# Altium PCB WaterAlarm_V1.1.PcbDoc
Units mm, origin at the board's own origin, x right, y up, seen from the top; angles counter-clockwise.
Board outline 85.11 x 72.79 mm, 2 copper layers (Top Layer, Bottom Layer), stack 1.581 mm thick; 31 components, 24 nets, 100 pads, 68 vias.
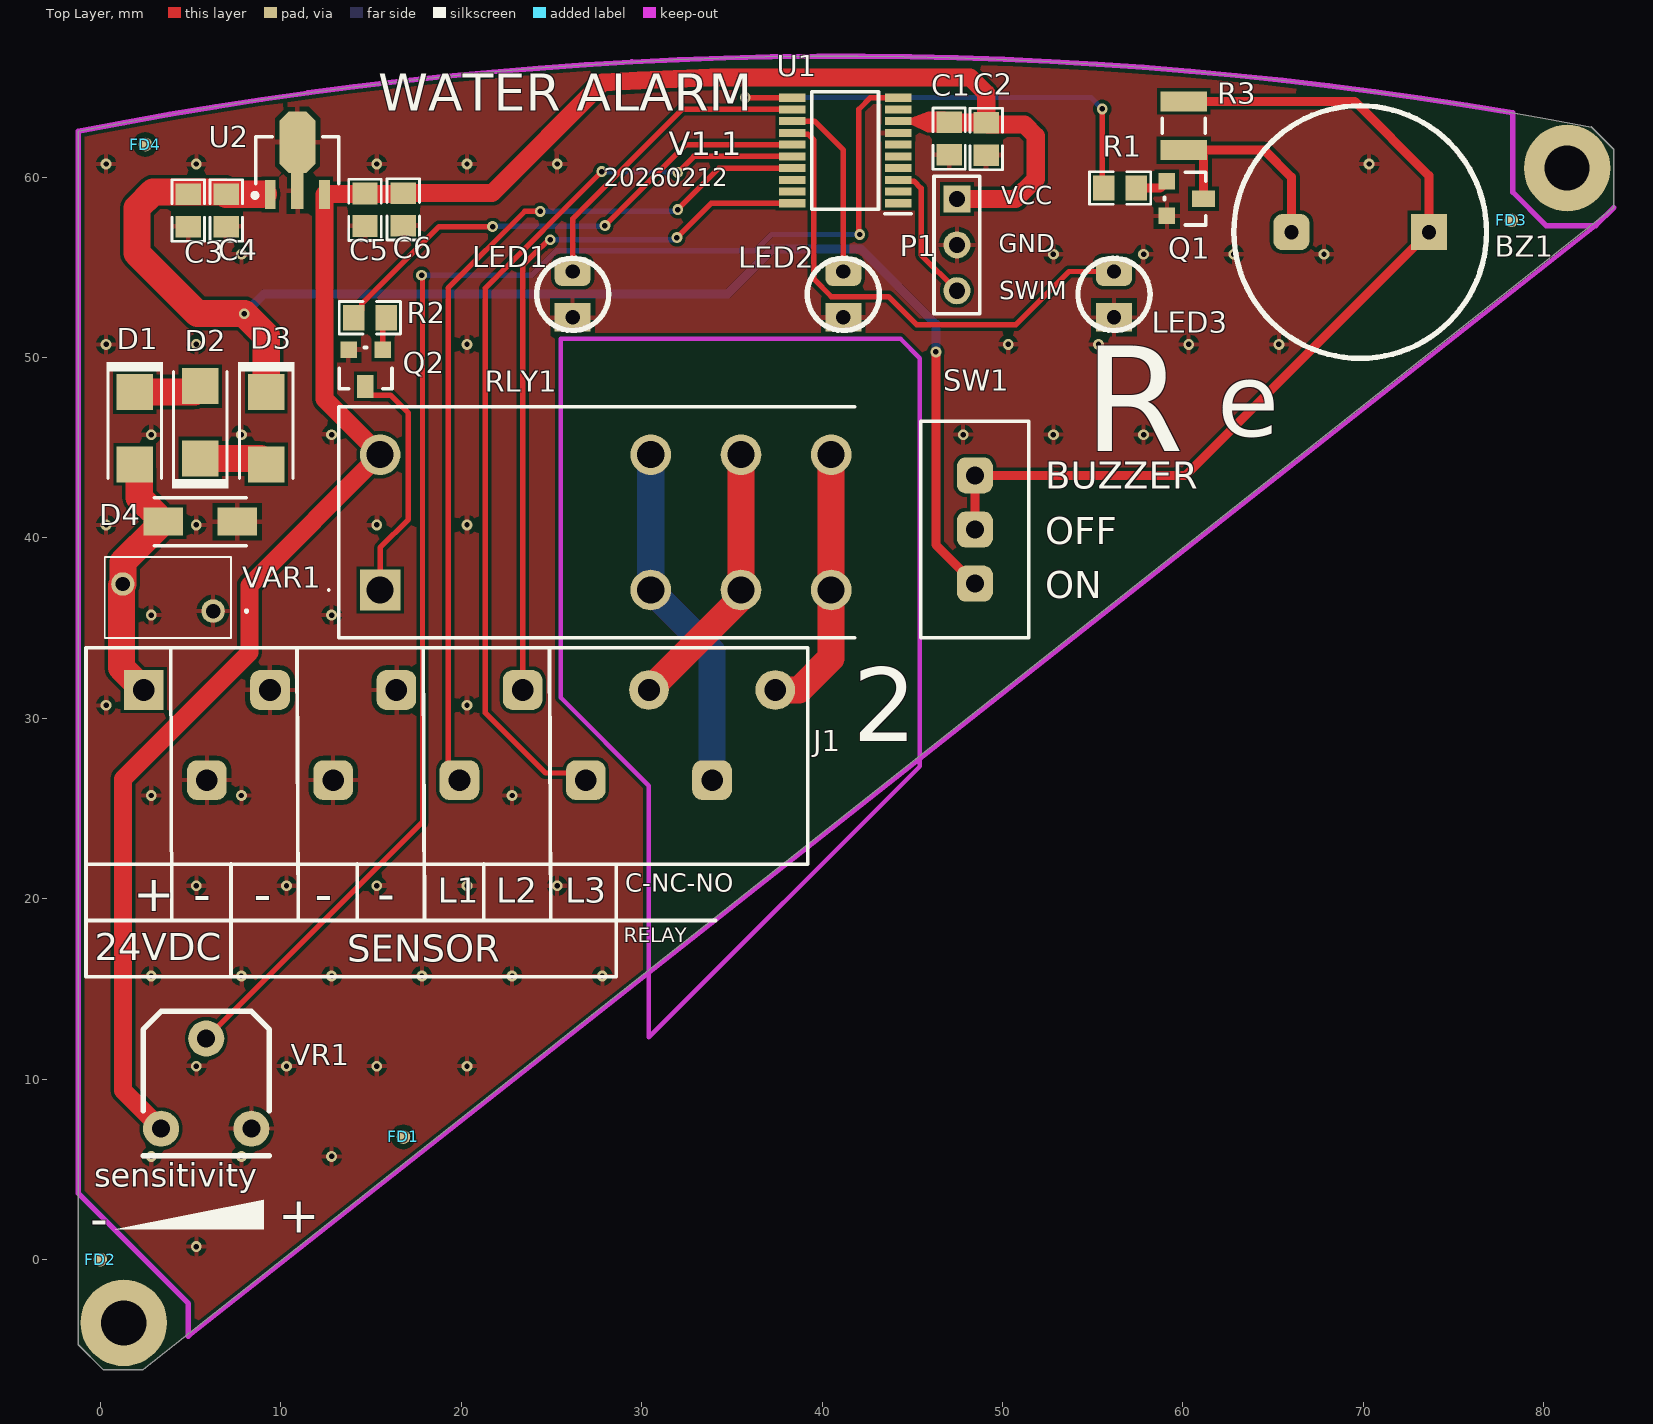
[diagram p0: Top Layer view]
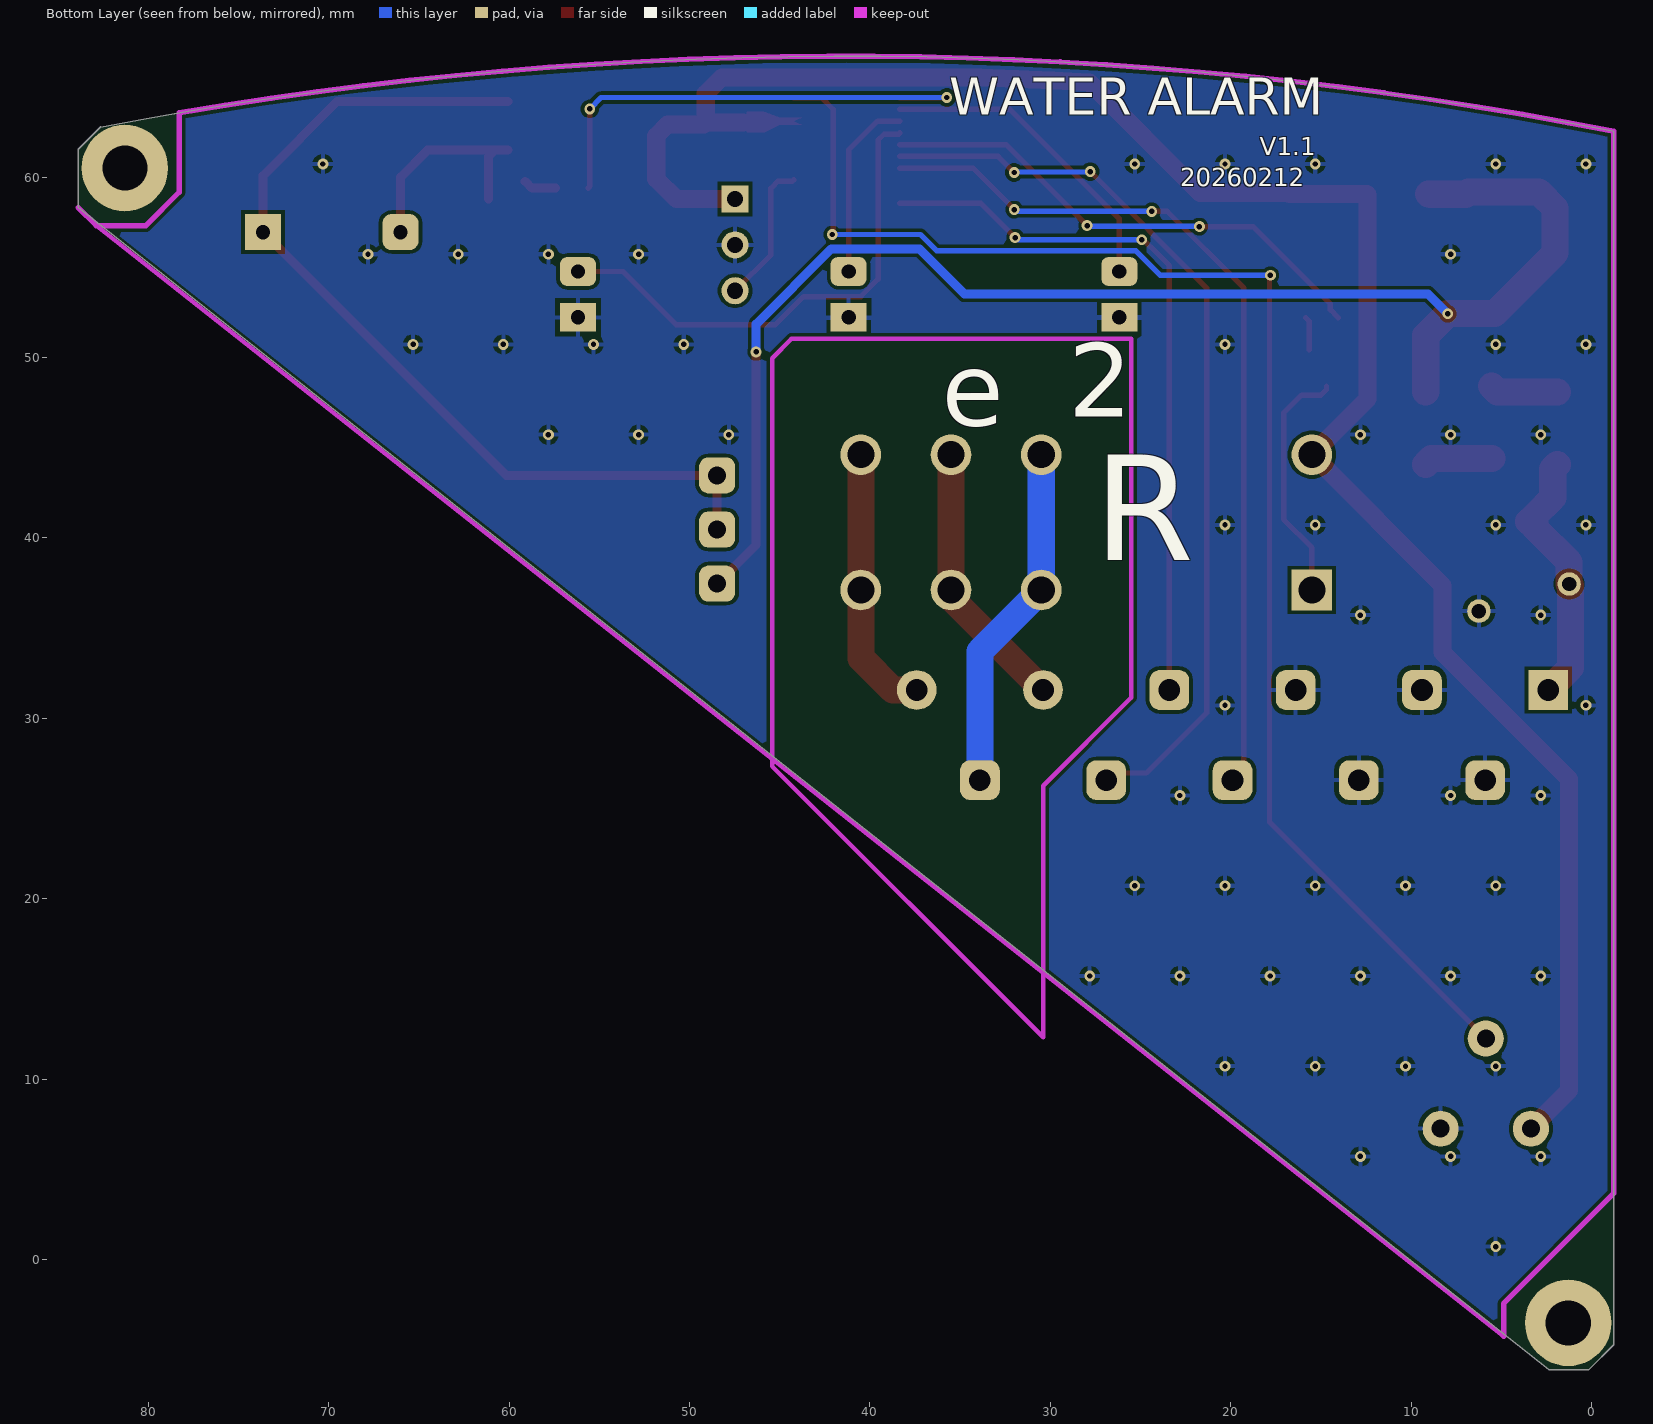
[diagram p1: Bottom Layer view, seen from below]

## Layer stack, top to bottom
Top Solder: solder mask 0.0254, SM-001, Dk 4
Top Layer: signal copper 0.0356
Dielectric 1: dielectric 1.51, FR-4, Dk 4.8
Bottom Layer: signal copper 0.0356
Bottom Solder: solder mask 0.0254, SM-001, Dk 4

## Board outline
-1.217,-4.717 0.157,-6.091 2.382,-6.091 83.883,58.313 83.883,61.541 82.636,62.788 82.632,62.766 ccw(c41.3,-152.4) -1.223,62.534 -1.217,62.534

## Design rules (kind name [scope] priority, off if disabled: settings)
Clearance [All] p1: gap=0.2 ignorepadtopadclearanceinfootprint=TRUE
PolygonConnect [All] p1: connectstyle=Relief reliefconductorwidth=0.254 reliefentries=4 polygonreliefangle="90 Angle" airgapwidth=0.254
RoutingVias [All] p1: holewidth=0.711 width=1.27 viastyle="Through Hole" minholewidth=0.3 minwidth=0.5 maxholewidth=0.711 maxwidth=1.27
SilkToSilkClearance [All] p1: silktosilkclearance=0.01
SilkToSolderMaskClearance [IsPad] p1: minsilkscreentomaskgap=0.01 clearancetoexposedcopper=TRUE
SolderMaskExpansion [All] p1: expansion=0.102 istentingtop=FALSE
SupplyNets "Schematic Supply Nets_3" [InNet('24V_IN')] p1: voltage=0.000
SupplyNets "Schematic Supply Nets_2" [InNet('VCC')] p2: voltage=0.000
SupplyNets "Schematic Supply Nets_1" [InNet('24V')] p3: voltage=0.000
SupplyNets "Schematic Supply Nets" [InNet('GND')] p4: voltage=0.000
Width [All] p1: maxlimit=3 minlimit=0.254 preferedwidth=0.254 minimp=50.000000 maximp=50.000000 favimp=50.000000
28 further rules are at their usual default settings.

## Classes and differential pairs
component class Sheet1_WATERALARM: BZ1 C1 C2 C3 C4 C5 C6 D1 D2 D3 D4 D? J1 LED1 LED2 LED3 P1 Q1 Q2 R1 R2 R3 RLY1 SW1 U1 U2 VAR1 VR1

## Components (designator, comment, footprint, x,y, rotation, side; value= is the part's Value field where it differs from the comment)
BZ1 "EPT-14A4009P050D" "piezo buzzer" 69.829,56.952 r90 top
C1 "CL21B104KBCNNNL" C0805-N 47.045,62.134 r90 top value=100nF
C2 "CL21A475KBQNNNE" C0805-N 49.103,62.108 r90 top value=4.7uF
C3 "CL21B104KBCNNNL" C0805-N 4.873,58.149 r90 top value=100nF
C4 "CL21A475KBQNNNE" C0805-N 6.982,58.149 r90 top value=4.7uF
C5 "CL21B104KBCNNNL" C0805-N 14.678,58.186 r90 top value=100nF
C6 "CL21A475KBQNNNE" C0805-N 16.786,58.211 r90 top value=4.7uF
D1 "US1D_R1_00001" SMA 1.91,46.081 r270 top value="200V 1A"
D2 "US1D_R1_00001" SMA 5.542,46.411 r90 top value="200V 1A"
D3 "US1D_R1_00001" SMA 9.199,46.081 r270 top value="200V 1A"
D4 "SMAJ36CA/TR7" DIONM5127X250N 5.542,40.899 r180 top value=58.1V
FD1 "FIDUCIAL_30MIL" FIDUCIAL_30MIL 16.8,6.8 r90 top
FD2 "FIDUCIAL_30MIL" FIDUCIAL_30MIL 0,0 r90 top (schematic designator FD1)
FD3 "FIDUCIAL_30MIL" FIDUCIAL_30MIL 78.2,57.6 r90 top (schematic designator FD1)
FD4 "FIDUCIAL_30MIL" FIDUCIAL_30MIL 2.5,61.8 r90 top (schematic designator FD1)
J1 "DG250-3.5-11P" "11 pin Terminal sping loaded" 2.408,31.573 r0 top
LED1 "3R4HD-7-TB" "led 3mm" 26.183,53.498 r270 top
LED2 "3R4HD-7-TB" "led 3mm" 41.183,53.498 r270 top
LED3 "3R4HD-7-TB" "led 3mm" 56.183,53.498 r270 top
P1 "PROGRAMMING" HDR1X3 47.477,58.781 r270 top
Q1 "BC817-40,215" SOT-23 60.126,58.806 r270 top
Q2 "BC817-40,215" SOT-23 14.71,49.414 r180 top
R1 "0805S8J0103T5E" C0805-N 56.52,59.39 r180 top value=10K
R2 "0805S8J0103T5E" C0805-N 14.94,52.202 r180 top value=10K
R3 "RI1210L122JT" C1210 60.05,62.845 r90 top value=1.2K
RLY1 "JW2SN-DC5V" JW2SNDC5V 15.51,37.115 r0 top
SW1 "L-KLS7-SS-12F20A-G5" "Slide Switch" 48.468,40.467 r90 top
U1 "STM8L051F3P6TR" SOP65P640X120-20N 41.28,61.473 r180 top
U2 "L78L33ACUTR" SOT89M 10.925,60.935 r90 top
VAR1 "ERZ-V05D560" ERZV05D180 6.253,35.946 r180 top
VR1 "L-KLS4-WH06-2A-103" Potentiometer 5.872,9.759 r0 top value=10K

## Footprints (in the part's own frame and the unit in brackets; to place one, negate y for a bottom-side part, rotate by r counter-clockwise, add the part's x,y. Pads: shape width x height; smd on the part's side, far side on the other; paste and mask are expansions set on the pad)
"11 pin Terminal sping loaded" [mm]
  rect 2.2x2.2 hole 1.2: 1(0,0)
  rrect50% 2.2x2.2 hole 1.2: 2(3.5,-5) 3(7,0) 4(10.5,-5) 5(14,0) 6(17.5,-5) 7(21,0) 8(24.5,-5) 10(31.5,-5)
  round 2.2 hole 1.2: 9(28,0) 11(35,0)
  silkscreen extent -3.2,-9.65 36.8,2.35, body extent -3.2,-9.57 36.8,2.43, height 13.15
C0805-N [mm] "Chip Resistor, Body 2.0x1.3mm, IPC Medium Density"
  rect 1.2x1.4 smd: 1(-0.9,0) 2(0.9,0)
  silkscreen extent -1.7,-0.9 1.7,0.9, body extent -1.07,-0.7 1.07,0.7, height 1.55
C1210 [mm] "Chip Capacitor, Body 3.2x2.5mm, IPC High Density"
  rect 1.1x2.6 smd: 1(-1.35,0) 2(1.35,0)
  silkscreen extent -0.4,-1.2 0.4,1.2, body extent -1.7,-1.35 1.7,1.35, height 1.3
DIONM5127X250N [mm]
  rect 2.2x1.55 smd: 1(-2.05,0) 2(2.05,0)
  silkscreen extent -2.55,-1.33 2.55,1.33, body extent -2.55,-1.33 2.55,1.33, height 2.25
ERZV05D180 [mm]
  round 1.3 hole 0.8: 1(0,0) 2(5,-1.5)
  silkscreen extent -1.9,-3 6,1.5, body extent -1,-3 6,1.5, height 10.1
FIDUCIAL_30MIL [mil]
  round 30 smd paste-99999 mask+11: 1(0,0)
HDR1X3 [mm]
  rect 1.5x1.5 hole 0.9: 1(0,0)
  round 1.5 hole 0.9: 2(2.54,0) 3(5.08,0)
  silkscreen extent -1.27,-1.27 6.35,1.27
JW2SNDC5V [mm]
  rect 2.25x2.25 hole 1.5: 1(0,0)
  round 2.25 hole 1.5: 2(15,0) 3(20,0) 4(25,0) 5(25,7.5) 6(20,7.5) 7(15,7.5) 8(0,7.5)
  silkscreen extent -2.9,-2.65 26.3,10.15, body extent -2.26,-2.64 26.34,10.16, height 20
"led 3mm" [mm]
  rrect50% 1.6x2 hole 0.8: 1(-1.27,0)
  rect 1.6x2 hole 0.8: 2(1.27,0)
  silkscreen extent -2,-2 2,2
"piezo buzzer" [mm]
  rect 2x2 hole 0.8: 1(0,-3.81)
  rrect50% 2x2 hole 0.8: 2(0,3.81)
  silkscreen extent -7,-7 7,7
Potentiometer [mm]
  round 2 hole 1: 1(-2.5,-2.5) 2(2.5,-2.5) 3(0,2.5)
  silkscreen extent -3.5,-4 3.5,4
"Slide Switch" [mm]
  rrect50% 2x2 hole 1: 1(-3,0) 2(0,0) 3(3,0)
  silkscreen extent -6,-3 6,3
SMA [mm]
  rect 2x2 smd: 1(-2,0) 2(2,0)
  silkscreen extent -3.66,-1.57 2.79,1.57, body extent -2.6,-1.3 2.6,1.3, height 2.42
SOP65P640X120-20N [mm]
  rect 1.475x0.45 smd: 1(-2.938,2.925) 2(-2.938,2.275) 3(-2.938,1.625) 4(-2.938,0.975) 5(-2.938,0.325) 6(-2.938,-0.325) 7(-2.938,-0.975) 8(-2.938,-1.625) 9(-2.938,-2.275) 10(-2.938,-2.925) 11(2.938,-2.925) 12(2.938,-2.275) 13(2.938,-1.625) 14(2.938,-0.975) 15(2.938,-0.325) 16(2.938,0.325) 17(2.938,0.975) 18(2.938,1.625) 19(2.938,2.275) 20(2.938,2.925)
  silkscreen extent -3.67,-3.25 1.85,3.5, body extent -3.2,-3.25 3.2,3.25, height 1.2
SOT89M [mm] "SOT89, 3-Leads, Body 4.5x2.4 mm, Pitch 1.5mm, Lead Span 4.1mm, IPC Low Density"
  rect 1.6x0.6 smd: 1(-1.9,1.5) 3(-1.9,-1.5)
  rect 2x0.7 smd: 2(-1.7,0)
  oct 3.4x2 smd: 2(1,0)
  silkscreen extent -2.07,-2.3 1.3,2.47, body extent -1.3,-2.3 1.3,2.3, height 1.6
SOT-23 [mil]
  rect 36x36 smd: 1(-37.5,-40) 2(37.5,-40)
  rect 36x50 smd: 3(0.5,40)
  silkscreen extent -58,-45 58,45, body extent -60,-48 60,48, height 43

## Part data
BZ1: library part Buzzer, "BUZZER PIEZO W/O CIRCUIT 9V 4-KHZ THT", Manufacturer=SANCO, Manufacturer Part Number=EPT-14A4009P050D
C1 C3 C5: library part Cap, "MLCC (2012) 0805 100nF 50VDC ±10% X7R", Manufacturer=SAMSUNG, Manufacturer Part Number=CL21B104KBCNNNL
C2 C4 C6: library part Cap, "MLCC (2012) 0805 4.7uF 50VDC ±10% X5R", Manufacturer=SAMSUNG, Manufacturer Part Number=CL21A475KBQNNNE
D1 D2 D3: library part MURA160T3G, "DIODE U.FAST SINGLE 1A 200V DO214AC (SMA) SMT", Manufacturer="ON Semiconductor", ComponentLink1Description="Datasheet link", ComponentLink1URL=http://www.onsemi.com/pub_link/Collateral/MURA160T3-D.PDF, Manufacturer Part Number=US1D_R1_00001
D4: library part SMAJ36CA-AT_TR7, "58.1V Clamp 6.9A Ipp Tvs Diode Surface Mount DO-214AC (SMA)", Manufacturer=YAGEO, Height=2.5mm, Manufacturer Part Number=SMAJ36CA/TR7
FD1 FD2 FD3 FD4: "FD"
J1: "TERM.BLK.3.50MM 11P PCB TYPE GRAY GAOSONG", Manufacturer=DEGSON/GAOSONG, Manufacturer Part Number=DG250-3.5-11P
LED1 LED2 LED3: library part LED2, "LED 3MM RED 30mcd 35° RED/DIFFUSED", Manufacturer="STRONG BASE", Manufacturer Part Number=3R4HD-7-TB
P1: library part "Header 3", "Header, 3-Pin"
Q1 Q2: library part NPN, "TRANSISTOR DIS.500mA 45V NPN SOT23 GEN. SMT", Manufacturer=NXP, Manufacturer Part Number=BC817-40,215
R1 R2: library part Res1, "RES.(2012) 0805 10K Ohms 5% 1/8W-S 100PPM", Manufacturer=ROYALOHM, Manufacturer Part Number=0805S8J0103T5E
R3: library part Res1, "RES.(3225) 1210 1.2K Ohms 5% 1/2W 200PPM", Manufacturer=HOTTECH, Manufacturer Part Number=RI1210L122JT
RLY1: "General Purpose Relay DPDT (2 Form C) 5VDC Coil Through Hole", Manufacturer=Panasonic, Manufacturer Part Number=JW2SN-DC5V
SW1: library part SW-SPDT, "SWITCH SLIDE 1P2T 500mA 50V On-On THT V/T", Manufacturer="KLS ELECTRONIC", Manufacturer Part Number=L-KLS7-SS-12F20A-G5
U1: "Integrated Circuit", Manufacturer_Name=STMicroelectronics, Mouser Part Number=511-STM8L051F3P6TR, Arrow Part Number=STM8L051F3P6TR, Arrow Price/Stock=https://www.arrow.com/en/products/stm8l051f3p6tr/stmicroelectronics?utm_currency=USD&region=nac, Datasheet Link=https://www.st.com/resource/en/datasheet/stm8l051f3.pdf, Height=1.2mm, Manufacturer_Part_Number=STM8L051F3P6TR, Mouser Price/Stock=https://www.mouser.co.uk/ProductDetail/STMicroelectronics/STM8L051F3P6TR?qs=jgnmLK5BaiFksEdVQwFp7A%3D%3D
U2: library part "Volt Reg", "IC-78L33 VOLTAGE REGULATOR 3.3V 100mA SOT89 ST", Manufacturer=STM, Manufacturer Part Number=L78L33ACUTR
VAR1: library part ERZ-V05D180, "56 V 250 A Varistor 1 Circuit Through Hole Disc 7mm", Manufacturer=Panasonic, Varistor Voltage="56 V", Manufacturer Part Number=ERZ-V05D560
VR1: library part "Res Tap", "TRIMPOT CARBON V 6MM 10K", Manufacturer="KLS ELECTRONIC", Manufacturer Part Number=L-KLS4-WH06-2A-103

## Free pads (board coordinates)
  round 4.8 hole 2.5: 0(1.3,-3.5) 0(81.3,60.5)

## Via types
v1: diameter 0.6, hole 0.3, Top Layer to Bottom Layer, tented both sides, 68 vias

## Nets (pads, with @x,y where several pads share a name; then routed paths per layer and width w, separated by ;. In a path a pad name is that pad's centre, name@x,y a point inside that pad or via, vN(x,y) a via of type N, cw(c..) or ccw(c..) an arc to the next point about the centre after c; other vN are vias at no path point)
24V: C3.2 C4.2 D3.1 SW1.1 U2.1 | length 78.9
  Top Layer w0.5: v1@46.309,50.323 v1(46.309,50.313) 46.309,39.626 SW1.1
  Top Layer w1.5: 9.047,59.06 8.986,59.06 8.975,59.049 C4.2 6.869,59.162 2.915,59.162 2.037,58.283 2.037,55.784 5.389,52.431 7.98,52.431 9.199,51.212 D3.1
  Bottom Layer w0.5: v1@7.98,52.431 9.067,53.518 34.759,53.518 37.259,56.018 42.135,56.018 46.309,51.844 v1(46.309,50.313)
  other v1: 7.98,52.421
24V_IN: D1.2 D4.2 J1.1 VAR1.2 | length 14.7
  Top Layer w1.5: D1.2 2.16,43.831 2.16,42.231 3.142,41.249 3.142,40.924 D4.2@3.167,40.899 ; J1.1 1.173,32.808 1.173,37.366 VAR1.2 1.253,38.66 3.142,40.549 3.142,40.874 D4.2@3.167,40.899 ; D4.2 D4.2@3.167,40.899
ADJ: U1.10 VR1.3 | length 81.9
  Top Layer w0.3: VR1.3 17.858,24.245 17.858,54.507 v1(17.81,54.555) ; v1@42.092,56.825 42.042,56.876 42.042,63.759 42.681,64.398 U1.10
  Bottom Layer w0.3: v1(17.81,54.555) 23.909,54.555 25.272,55.918 36.311,55.918 37.208,56.816 v1(42.092,56.816)
BUZ: R1.2 U1.11 | length 27.1
  Top Layer w0.3: v1@35.742,64.42 35.764,64.398 U1.11 ; v1(55.529,63.775) 55.529,59.481 R1.2
  Bottom Layer w0.3: v1(35.742,64.41) 54.903,64.41 v1@55.529,63.785
COM: J1.9 RLY1.3 RLY1.6 | length 15.2
  Top Layer w1.5: J1.9 35.51,36.675 RLY1.3 RLY1.6
GND: C1.1 C2.1 C3.1 C4.1 C5.1 C6.1 D4.1 J1.2 J1.3 J1.4 J1.5 LED1.2 LED2.2 LED3.2 P1.2 Q1.2 Q2.2 U1.7 U2.2 VAR1.1 VR1.2
  other v1: 5.323,0.723 2.823,5.723 7.823,5.723 12.823,5.723 5.323,10.723 10.323,10.723 15.323,10.723 20.323,10.723 2.823,15.723 7.823,15.723 12.823,15.723 17.823,15.723 22.823,15.723 27.823,15.723 5.323,20.723 10.323,20.723 15.323,20.723 20.323,20.723 25.323,20.723 2.823,25.723 7.823,25.723 22.823,25.723 0.323,30.723 20.323,30.723 2.823,35.723 12.823,35.723 0.323,40.723 5.323,40.723 15.323,40.723 20.323,40.723 2.823,45.723 7.823,45.723 12.823,45.723 47.823,45.723 52.823,45.723 57.823,45.723 0.323,50.723 5.323,50.723 20.323,50.723 50.323,50.723 55.323,50.723 60.323,50.723 65.323,50.723 7.823,55.723 52.823,55.723 57.823,55.723 62.823,55.723 67.823,55.723 0.323,60.723 5.323,60.723 15.323,60.723 20.323,60.723 25.323,60.723 70.323,60.723
"IN L1": J1.6 U1.17 | length 49.4
  Top Layer w0.3: J1.6 19.283,27.198 19.283,53.853 23.525,58.095 v1(24.389,58.095) ; v1(32.009,58.197) 32.009,58.222 34.285,60.498 U1.17
  Bottom Layer w0.3: v1(24.389,58.095) 31.826,58.095 31.927,58.197 v1(32.009,58.197)
"IN L2": J1.7 U1.20 | length 39.9
  Top Layer w0.3: J1.7 23.408,55.095 24.466,56.153 24.478,56.153 24.856,56.53 v1(24.937,56.53) ; v1(31.958,56.647) 33.859,58.548 U1.20
  Bottom Layer w0.3: v1(24.937,56.53) 31.76,56.53 31.877,56.647 v1(31.958,56.647)
"IN L3": J1.8 U1.16 | length 50.7
  Top Layer w0.3: J1.8 26.508,26.973 24.675,26.973 21.341,30.307 21.341,53.853 v1(27.792,60.305) ; v1(32.009,60.254) 32.903,61.148 U1.16
  Bottom Layer w0.3: v1(27.792,60.305) 27.818,60.279 31.983,60.279 v1(32.009,60.254)
L1: LED1.1 U1.12 | length 17.6
  Top Layer w0.3: LED1.1 26.183,57.68 32.252,63.748 U1.12
L2: LED2.1 U1.13 | length 10.2
  Top Layer w0.3: U1.13 39.578,63.098 41.183,61.494 LED2.1
L3: LED3.1 U1.14 | length 28
  Top Layer w0.3: U1.14 38.417,62.373 39.224,62.373 39.552,62.045 39.552,54.338 40.512,53.378 43.686,53.378 45.243,51.821 50.754,51.821 53.701,54.768 LED3.1
NC: J1.10 RLY1.2 RLY1.7 | length 19.4
  Bottom Layer w1.5: RLY1.7 RLY1.2 33.908,33.717 J1.10
NetBZ1_1: BZ1.1 R3.2 SW1.2 SW1.3 | length 52.2
  Top Layer w0.5: SW1.2 SW1.3 60.155,43.467 BZ1.1 73.639,60.076 69.521,64.195 R3.2
NetBZ1_2: BZ1.2 Q1.3 R3.1 | length 12.5
  Top Layer w0.5: R3.1 R3.1@60.8,61.495 ; Q1.3 61.142,61.153 R3.1@60.8,61.495 ; BZ1.2 66.019,60 64.524,61.495 R3.1@60.8,61.495
NetD1_1: D1.1 D2.2 | length 3.8
  Top Layer w1.5: D1.1 5.212,48.081 D2.2
NetD2_1: D2.1 D3.2 | length 3.8
  Top Layer w1.5: D2.1 8.869,44.411 D3.2
NetQ1_1: Q1.1 R1.1 | length 1.8
  Top Layer w0.5: R1.1 58.742,59.39 Q1.1
NetQ2_1: Q2.1 R2.1 | length 1.8
  Top Layer w0.3: Q2.1 15.663,52.025 R2.1
NetQ2_3: Q2.3 RLY1.1 | length 13.5
  Top Layer w0.3: Q2.3 14.698,48.221 15.005,47.913 16.079,47.913 17.073,46.919 17.073,41.026 15.51,39.463 RLY1.1
NO: J1.11 RLY1.4 RLY1.5 | length 15.1
  Top Layer w1.5: J1.11 38.735,31.573 40.492,33.33 40.492,37.097 RLY1.4 RLY1.5
RLY: R2.2 U1.15 | length 28.5
  Top Layer w0.3: R2.2 14.49,52.652 14.49,52.971 18.775,57.257 v1(21.747,57.257) ; v1(27.97,57.308) 32.461,61.798 U1.15
  Bottom Layer w0.3: v1(21.747,57.257) 21.772,57.282 27.945,57.282 v1(27.97,57.308)
SWIM: P1.3 U1.3 | length 8
  Top Layer w0.3: U1.3 44.293,59.773 45.1,59.773 45.496,59.377 45.496,55.682 P1.3
VCC: C1.2 C2.2 C5.2 C6.2 P1.1 RLY1.8 U1.8 U2.3 VR1.1 | length 113.4
  Top Layer w1: VR1.1 1.249,9.382 1.249,26.65 8.26,33.66 8.26,37.364 RLY1.8 12.425,47.699 U2.3 12.463,59.073 14.678,59.073 16.748,59.073 C6.2 21.722,59.111 27.845,65.234 cw(c41.3,-152.4) 33.865,65.523 47.796,65.523 47.807,65.512 48.214,65.512 49.103,64.623 C2.2 ; C1.2 47.058,63.021 49.09,63.021 C2.2 ; P1.1 50.728,58.781 51.846,59.898 51.846,62.284 51.222,62.908 49.203,62.908 C2.2
pads on no net: FD1.1 FD2.1 FD3.1 FD4.1 U1.1 U1.2 U1.4 U1.5 U1.6 U1.9 U1.18 U1.19

## Polygon pours and split planes (outlines as drawn)
GND on Top Layer "GND_L01_P005" (solid, remove dead copper, pour order 5): -5.075,67.29 -5.99,66.375 -5.99,-10.561 21.341,-10.561 92.816,60.914 86.847,66.883 86.847,67.391 -4.644,67.391
GND on Bottom Layer "GND_L02_P006" (solid, remove dead copper, pour order 6): -5.075,67.29 -5.99,66.375 -5.99,-10.561 21.341,-10.561 92.816,60.914 86.847,66.883 86.847,67.391 -4.644,67.391

## Keep-outs
Keep-Out Layer:
  lines w0.254: 4.881,-4.237 82.878,57.308 ; 25.532,31.146 25.532,51.034 44.353,51.034 45.42,49.967 45.42,27.336 30.408,12.324 30.408,26.269 25.532,31.146
  lines w0.3: -1.223,62.534 cw(c41.3,-152.4) 78.284,63.556 78.284,59.159 80.136,57.308 82.878,57.308 83.883,58.313 ; -1.217,62.534 -1.217,3.665 4.881,-2.433 4.881,-4.237

## Other copper
Top Layer:
  pour cut-out: 2.494,61.125 cw(c2.494,61.807) 1.813,61.807 cw(c2.494,61.807) 2.494,62.488 cw(c2.494,61.807) 3.176,61.807 cw(c2.494,61.807)
  pour cut-out: 78.194,56.925 cw(c78.194,57.607) 77.513,57.607 cw(c78.194,57.607) 78.194,58.288 cw(c78.194,57.607) 78.876,57.607 cw(c78.194,57.607)
  pour cut-out: -0.006,-0.675 cw(c-0.006,0.007) -0.687,0.007 cw(c-0.006,0.007) -0.006,0.688 cw(c-0.006,0.007) 0.676,0.007 cw(c-0.006,0.007)
  pour cut-out: 16.794,6.125 cw(c16.794,6.807) 16.113,6.807 cw(c16.794,6.807) 16.794,7.488 cw(c16.794,6.807) 17.476,6.807 cw(c16.794,6.807)
  region net VCC: 43.792,63.301 44.963,63.301 45.852,63.607 46.842,63.607 46.842,63.366 47.045,63.163 46.981,63.098 44.218,63.098
  region net VCC: 43.792,62.896 44.963,62.896 45.826,62.489 46.842,62.489 46.842,62.83 47.045,63.034 46.981,63.098 44.218,63.098

## Silkscreen, mask and mechanical layers (free items; w line width, h text height)
Top Overlay:
  region: 9.047,3.333 9.047,1.682 0.817,1.682
  lines w0.2: -0.796,15.676 7.244,15.676 ; -0.792,15.676 -0.792,18.801 ; -0.792,21.923 -0.792,18.798 34.1,18.798 ; 3.9,33.9 3.972,18.8 ; 7.24,15.676 28.6,15.676 28.6,18.801 ; 7.244,15.679 7.244,18.805 ; 7.244,18.801 7.244,21.927 ; 10.9,33.9 10.972,18.8 ; 14.244,18.801 14.244,21.927 ; 17.9,33.9 17.972,18.8 ; 21.244,18.801 21.244,21.927 ; 24.9,33.9 24.972,18.8 ; 28.6,18.778 28.6,21.904
  text "WATER ALARM" at 15.4,63 h3.5
  text "V1.1" at 31.5,61.2 h1.3
  text "20260212" at 27.9,59.5 h1
  text "VCC" at 49.946,58.495 h1
  text "GND" at 49.794,55.828 h1
  text "SWIM" at 49.819,53.238 h1
  text "e" at 61.9,44.3 h7
  text "R" at 54.5,42.9 h10
  text "BUZZER" at 52.379,42.728 h1.5
  text "OFF" at 52.379,39.655 h1.5
  text "ON" at 52.379,36.657 h1.5
  text "2" at 41.7,27.4 h7
  text "C-NC-NO" at 29.1,20.4 h1
  text "L1" at 18.703,19.776 h1.4
  text "L2" at 21.955,19.776 h1.4
  text "L3" at 25.783,19.776 h1.4
  text "+" at 1.831,19.309 h2
  text "-" at 15.343,19.309 h2
  text "-" at 5.158,19.276 h2
  text "-" at 8.511,19.276 h2
  text "-" at 11.889,19.276 h2
  text "RELAY" at 29,17.6 h0.8
  text "24VDC" at -0.3,16.6 h1.5
  text "SENSOR" at 13.7,16.5 h1.5
  text "sensitivity" at -0.326,4.044 h1.3
  text "+" at 9.86,1.478 h2
  text "-" at -0.554,1.301 h2
Bottom Overlay:
  text "WATER ALARM" at 35.6,62.8 h3.5
  text "V1.1" at 18.4,61.2 h1
  text "20260212" at 22.8,59.5 h1
  text "2" at 29.014,45.38 h7
  text "e" at 36.024,44.898 h7
  text "R" at 27.591,36.846 h10
Mechanical 1:
  lines w0.254: 2.382,-6.091 83.883,58.313
  lines w0.3: -1.223,62.534 cw(c41.3,-152.4) 82.632,62.766 ; -1.217,62.534 -1.217,-4.717 0.157,-6.091 2.382,-6.091 ; 82.636,62.788 83.883,61.541 83.883,58.313